# EAGLE board SignalMast-ColorLight-Dwarf_array (EAGLE 7.7.0)
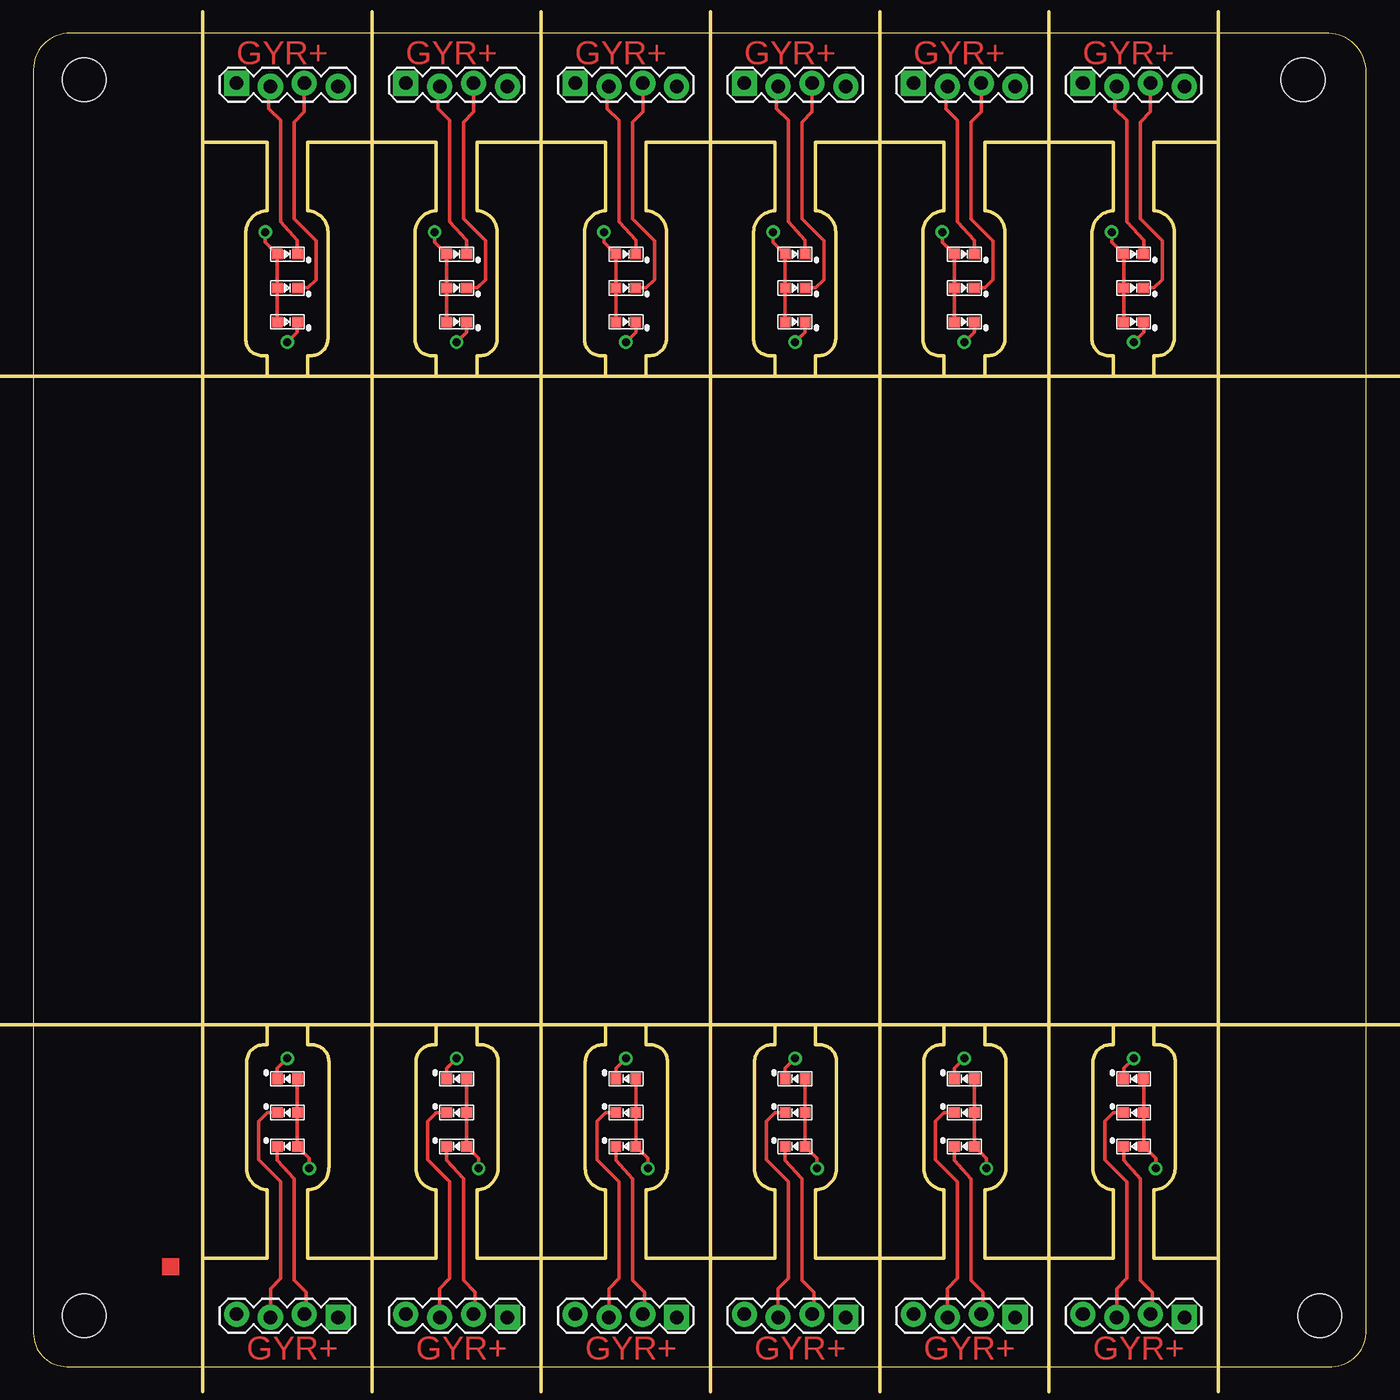
[diagram p0: board, top side]
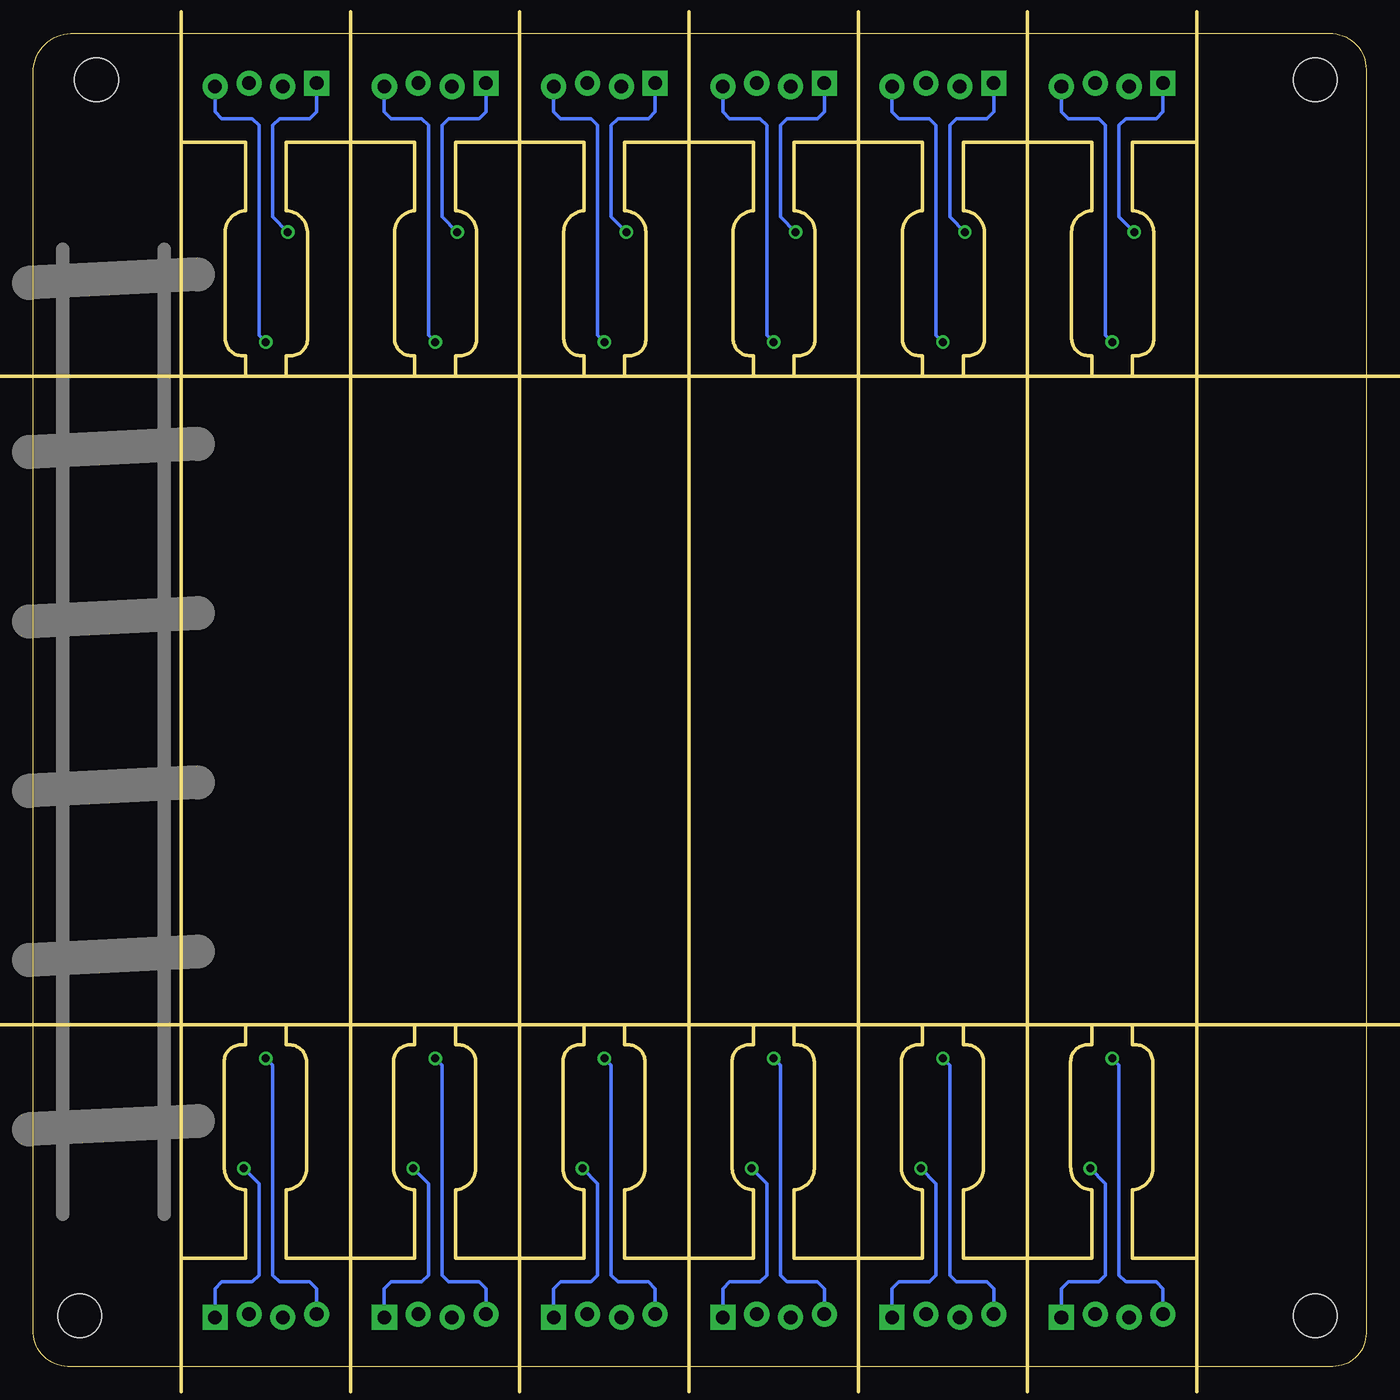
[diagram p1: board, bottom side, seen from below]

Size 100.01 x 100 mm. Coordinates in mm from the lower left corner, seen from the top.
Outline: 22.18,14.99 arc-90 20.58,13.25 20.58,8.13 30.24,8.13 30.24,13.25 arc-90 28.71,14.99 28.71,22.86 arc-90 30.01,24.13 30.24,24.13 30.24,25.66 20.58,25.66 20.58,24.13 20.96,24.13 arc-90 22.18,22.86 22.18,14.99
Outline: 16.01,22.86 16.01,14.99 arc90 17.54,13.25 17.54,8.13 12.71,8.13 12.71,25.66 17.54,25.66 17.54,24.13 17.31,24.13 arc90 16.01,22.86
Outline: 34.88,14.99 arc-90 33.28,13.25 33.28,8.13 42.94,8.13 42.94,13.25 arc-90 41.41,14.99 41.41,22.86 arc-90 42.71,24.13 42.94,24.13 42.94,25.66 33.28,25.66 33.28,24.13 33.66,24.13 arc-90 34.88,22.86 34.88,14.99
Outline: 47.58,14.99 arc-90 45.98,13.25 45.98,8.13 55.64,8.13 55.64,13.25 arc-90 54.11,14.99 54.11,22.86 arc-90 55.41,24.13 55.64,24.13 55.64,25.66 45.98,25.66 45.98,24.13 46.36,24.13 arc-90 47.58,22.86 47.58,14.99
Outline: 60.28,14.99 arc-90 58.68,13.25 58.68,8.13 68.34,8.13 68.34,13.25 arc-90 66.81,14.99 66.81,22.86 arc-90 68.11,24.13 68.34,24.13 68.34,25.66 58.68,25.66 58.68,24.13 59.06,24.13 arc-90 60.28,22.86 60.28,14.99
Outline: 72.98,14.99 arc-90 71.38,13.25 71.38,8.13 81.04,8.13 81.04,13.25 arc-90 79.51,14.99 79.51,22.86 arc-90 80.81,24.13 81.04,24.13 81.04,25.66 71.38,25.66 71.38,24.13 71.76,24.13 arc-90 72.98,22.86 72.98,14.99
Outline: 85.68,14.99 arc-90 84.08,13.25 84.08,8.13 88.91,8.13 88.91,25.66 84.08,25.66 84.08,24.13 84.46,24.13 arc-90 85.68,22.86 85.68,14.99
Outline: 28.64,84.97 arc-90 30.24,86.7 30.24,91.82 20.58,91.82 20.58,86.7 arc-90 22.11,84.97 22.11,77.09 arc-90 20.81,75.82 20.58,75.82 20.58,74.3 30.24,74.3 30.24,75.82 29.85,75.82 arc-90 28.64,77.09 28.64,84.97
Outline: 34.81,77.09 34.81,84.97 arc90 33.28,86.7 33.28,91.82 42.94,91.82 42.94,86.7 arc90 41.34,84.97 41.34,77.09 arc90 42.55,75.82 42.94,75.82 42.94,74.3 33.28,74.3 33.28,75.82 33.51,75.82 arc90 34.81,77.09
Outline: 47.51,77.09 47.51,84.97 arc90 45.98,86.7 45.98,91.82 55.64,91.82 55.64,86.7 arc90 54.04,84.97 54.04,77.09 arc90 55.25,75.82 55.64,75.82 55.64,74.3 45.98,74.3 45.98,75.82 46.21,75.82 arc90 47.51,77.09
Outline: 60.21,77.09 60.21,84.97 arc90 58.68,86.7 58.68,91.82 68.34,91.82 68.34,86.7 arc90 66.74,84.97 66.74,77.09 arc90 67.95,75.82 68.34,75.82 68.34,74.3 58.68,74.3 58.68,75.82 58.91,75.82 arc90 60.21,77.09
Outline: 15.94,84.97 arc-90 17.54,86.7 17.54,91.82 12.71,91.82 12.71,74.3 17.54,74.3 17.54,75.82 17.15,75.82 arc-90 15.94,77.09 15.94,84.97
Outline: 72.91,77.09 72.91,84.97 arc90 71.38,86.7 71.38,91.82 81.04,91.82 81.04,86.7 arc90 79.44,84.97 79.44,77.09 arc90 80.65,75.82 81.04,75.82 81.04,74.3 71.38,74.3 71.38,75.82 71.61,75.82 arc90 72.91,77.09
Outline: 85.61,77.09 85.61,84.97 arc90 84.08,86.7 84.08,91.82 88.91,91.82 88.91,74.3 84.08,74.3 84.08,75.82 84.31,75.82 arc90 85.61,77.09
Copper layers (1*16): Top 0.035mm / dielectric 1.5mm / Bottom 0.035mm
Design rules "default": minimum track width 10mil, minimum drill 24mil, track to track 8mil, track to pad 8mil, pad to pad 8mil, via to via 8mil, smd to smd 8mil, copper to edge 40mil, drill to drill 8mil, minimum pad ring 10mil, minimum via ring 8mil, stop-mask expansion 4mil, vias tented up to drill 0mil, thermal gap 10mil
Net classes: 0 default: width 0.203 mm
Holes 3.3 mm at 3.82,3.81 96.53,3.81 95.26,96.52 3.82,96.52
Milling: 23 lines

## Footprints (pad centres in the part's own frame; a part is rotated, then mirrored left to right if it is on the bottom)
1X04_LOCK = drill 1.016 pad 1.88 square: 1 0,0.127 | drill 1.016 pad 1.88: 2 2.54,-0.127; 3 5.08,0.127; 4 7.62,-0.127
0603-LED = smd 0.8 x 0.8: A 0.75,0; C -0.75,0

## Placement (x,y rotation side)
BOARD1  BOARD  [BOARD-SEEED10X10-NOHOLES]  0.01,0 0 top
GYR+  0.100  [1X04_LOCK]  22.87,3.81 180 top
GYR+1  0.100  [1X04_LOCK]  35.57,3.81 180 top
GYR+2  0.100  [1X04_LOCK]  48.27,3.81 180 top
GYR+3  0.100  [1X04_LOCK]  60.97,3.81 180 top
GYR+4  0.100  [1X04_LOCK]  73.67,3.81 180 top
GYR+5  0.100  [1X04_LOCK]  86.37,3.81 180 top
GYR+6  0.100  [1X04_LOCK]  27.95,96.14 0 top
GYR+7  0.100  [1X04_LOCK]  40.65,96.14 0 top
GYR+8  0.100  [1X04_LOCK]  53.35,96.14 0 top
GYR+9  0.100  [1X04_LOCK]  15.25,96.14 0 top
GYR+10  0.100  [1X04_LOCK]  66.05,96.14 0 top
GYR+11  0.100  [1X04_LOCK]  78.75,96.14 0 top
LED1  R  [0603-LED]  19.06,16.51 0 top
LED2  Y  [0603-LED]  19.06,19.05 0 top
LED3  G  [0603-LED]  19.06,21.59 0 top
LED4  R  [0603-LED]  31.76,16.51 0 top
LED5  Y  [0603-LED]  31.76,19.05 0 top
LED6  G  [0603-LED]  31.76,21.59 0 top
LED7  R  [0603-LED]  44.46,16.51 0 top
LED8  Y  [0603-LED]  44.46,19.05 0 top
LED9  G  [0603-LED]  44.46,21.59 0 top
LED10  R  [0603-LED]  57.16,16.51 0 top
LED11  Y  [0603-LED]  57.16,19.05 0 top
LED12  G  [0603-LED]  57.16,21.59 0 top
LED13  R  [0603-LED]  69.86,16.51 0 top
LED14  Y  [0603-LED]  69.86,19.05 0 top
LED15  G  [0603-LED]  69.86,21.59 0 top
LED16  R  [0603-LED]  82.56,16.51 0 top
LED17  Y  [0603-LED]  82.56,19.05 0 top
LED18  G  [0603-LED]  82.56,21.59 0 top
LED19  R  [0603-LED]  31.76,83.44 180 top
LED20  Y  [0603-LED]  31.76,80.9 180 top
LED21  G  [0603-LED]  31.76,78.36 180 top
LED22  R  [0603-LED]  44.46,83.44 180 top
LED23  Y  [0603-LED]  44.46,80.9 180 top
LED24  G  [0603-LED]  44.46,78.36 180 top
LED25  R  [0603-LED]  57.16,83.44 180 top
LED26  Y  [0603-LED]  57.16,80.9 180 top
LED27  G  [0603-LED]  57.16,78.36 180 top
LED28  R  [0603-LED]  19.06,83.44 180 top
LED29  Y  [0603-LED]  19.06,80.9 180 top
LED30  G  [0603-LED]  19.06,78.36 180 top
LED31  R  [0603-LED]  69.86,83.44 180 top
LED32  Y  [0603-LED]  69.86,80.9 180 top
LED33  G  [0603-LED]  69.86,78.36 180 top
LED34  R  [0603-LED]  82.56,83.44 180 top
LED35  Y  [0603-LED]  82.56,80.9 180 top
LED36  G  [0603-LED]  82.56,78.36 180 top

## Library data of the parts
BOARD1 GYR+ GYR+1-GYR+11 = SPCoast
LED1 LED4 LED7 LED10 LED13 LED16 LED19 LED22 LED25 LED28 LED31 LED34 = SPCoast; OPL: 19-217-R6C-AL1M2VY-3T
LED2 LED5 LED8 LED11 LED14 LED17 LED20 LED23 LED26 LED29 LED32 LED35 = SPCoast; OPL: 19-217-Y5C-AM1N1VY-3T
LED3 LED6 LED9 LED12 LED15 LED18 LED21 LED24 LED27 LED30 LED33 LED36 = SPCoast; OPL: 19-217-G7C-AN1P2-3T

## Nets
BG: GYR+.4 LED3.C
BG1: GYR+1.4 LED6.C
BG2: GYR+2.4 LED9.C
BG3: GYR+3.4 LED12.C
BG4: GYR+4.4 LED15.C
BG5: GYR+5.4 LED18.C
BG6: GYR+6.4 LED21.C
BG7: GYR+7.4 LED24.C
BG8: GYR+8.4 LED27.C
BG9: GYR+9.4 LED30.C
BG10: GYR+10.4 LED33.C
BG11: GYR+11.4 LED36.C
BR: GYR+.2 LED1.C
BR1: GYR+1.2 LED4.C
BR2: GYR+2.2 LED7.C
BR3: GYR+3.2 LED10.C
BR4: GYR+4.2 LED13.C
BR5: GYR+5.2 LED16.C
BR6: GYR+6.2 LED19.C
BR7: GYR+7.2 LED22.C
BR8: GYR+8.2 LED25.C
BR9: GYR+9.2 LED28.C
BR10: GYR+10.2 LED31.C
BR11: GYR+11.2 LED34.C
BV+: GYR+.1 LED1.A LED2.A LED3.A
BV+1: GYR+1.1 LED4.A LED5.A LED6.A
BV+2: GYR+2.1 LED7.A LED8.A LED9.A
BV+3: GYR+3.1 LED10.A LED11.A LED12.A
BV+4: GYR+4.1 LED13.A LED14.A LED15.A
BV+5: GYR+5.1 LED16.A LED17.A LED18.A
BV+6: GYR+6.1 LED19.A LED20.A LED21.A
BV+7: GYR+7.1 LED22.A LED23.A LED24.A
BV+8: GYR+8.1 LED25.A LED26.A LED27.A
BV+9: GYR+9.1 LED28.A LED29.A LED30.A
BV+10: GYR+10.1 LED31.A LED32.A LED33.A
BV+11: GYR+11.1 LED34.A LED35.A LED36.A
BY: GYR+.3 LED2.C
BY1: GYR+1.3 LED5.C
BY2: GYR+2.3 LED8.C
BY3: GYR+3.3 LED11.C
BY4: GYR+4.3 LED14.C
BY5: GYR+5.3 LED17.C
BY6: GYR+6.3 LED20.C
BY7: GYR+7.3 LED23.C
BY8: GYR+8.3 LED26.C
BY9: GYR+9.3 LED29.C
BY10: GYR+10.3 LED32.C
BY11: GYR+11.3 LED35.C

## Tracks (layer width: path | path; a pad name or v marks a point on that pad's centre or on a via)
BG  (via drill 0.6)
  Top 0.254: v19.06,23.12 18.31,22.37 LED3.C
  Bottom 0.254: GYR+.4 15.25,5.85 15.76,6.35 18.04,6.35 18.55,6.86 18.55,22.61 v19.06,23.12
BG1  (via drill 0.6)
  Top 0.254: v31.76,23.12 31.01,22.37 LED6.C
  Bottom 0.254: GYR+1.4 27.95,5.85 28.46,6.35 30.74,6.35 31.25,6.86 31.25,22.61 v31.76,23.12
BG2  (via drill 0.6)
  Top 0.254: v44.46,23.12 43.71,22.37 LED9.C
  Bottom 0.254: GYR+2.4 40.65,5.85 41.16,6.35 43.44,6.35 43.95,6.86 43.95,22.61 v44.46,23.12
BG3  (via drill 0.6)
  Top 0.254: v57.16,23.12 56.41,22.37 LED12.C
  Bottom 0.254: GYR+3.4 53.35,5.85 53.86,6.35 56.14,6.35 56.65,6.86 56.65,22.61 v57.16,23.12
BG4  (via drill 0.6)
  Top 0.254: v69.86,23.12 69.11,22.37 LED15.C
  Bottom 0.254: GYR+4.4 66.05,5.85 66.56,6.35 68.84,6.35 69.35,6.86 69.35,22.61 v69.86,23.12
BG5  (via drill 0.6)
  Top 0.254: v82.56,23.12 81.81,22.37 LED18.C
  Bottom 0.254: GYR+5.4 78.75,5.85 79.26,6.35 81.54,6.35 82.05,6.86 82.05,22.61 v82.56,23.12
BG6  (via drill 0.6)
  Top 0.254: v31.76,76.84 32.51,77.59 LED21.C
  Bottom 0.254: GYR+6.4 35.57,94.11 35.06,93.6 32.78,93.6 32.27,93.09 32.27,77.35 v31.76,76.84
BG7  (via drill 0.6)
  Top 0.254: v44.46,76.84 45.21,77.59 LED24.C
  Bottom 0.254: GYR+7.4 48.27,94.11 47.76,93.6 45.48,93.6 44.97,93.09 44.97,77.35 v44.46,76.84
BG8  (via drill 0.6)
  Top 0.254: v57.16,76.84 57.91,77.59 LED27.C
  Bottom 0.254: GYR+8.4 60.97,94.11 60.46,93.6 58.18,93.6 57.67,93.09 57.67,77.35 v57.16,76.84
BG9  (via drill 0.6)
  Top 0.254: v19.06,76.84 19.81,77.59 LED30.C
  Bottom 0.254: GYR+9.4 22.87,94.11 22.36,93.6 20.08,93.6 19.57,93.09 19.57,77.35 v19.06,76.84
BG10  (via drill 0.6)
  Top 0.254: v69.86,76.84 70.61,77.59 LED33.C
  Bottom 0.254: GYR+10.4 73.67,94.11 73.16,93.6 70.88,93.6 70.37,93.09 70.37,77.35 v69.86,76.84
BG11  (via drill 0.6)
  Top 0.254: v82.56,76.84 83.31,77.59 LED36.C
  Bottom 0.254: GYR+11.4 86.37,94.11 85.86,93.6 83.58,93.6 83.07,93.09 83.07,77.35 v82.56,76.84
BR
  Top 0.254: GYR+.2 20.46,4.07 20.46,5.59 19.57,6.48 19.57,14.1 18.31,15.49 LED1.C
BR1
  Top 0.254: GYR+1.2 33.16,4.07 33.16,5.59 32.27,6.48 32.27,14.1 31.01,15.49 LED4.C
BR2
  Top 0.254: GYR+2.2 45.86,4.07 45.86,5.59 44.97,6.48 44.97,14.1 43.71,15.49 LED7.C
BR3
  Top 0.254: GYR+3.2 58.56,4.07 58.56,5.59 57.67,6.48 57.67,14.1 56.41,15.49 LED10.C
BR4
  Top 0.254: GYR+4.2 71.26,4.07 71.26,5.59 70.37,6.48 70.37,14.1 69.11,15.49 LED13.C
BR5
  Top 0.254: GYR+5.2 83.96,4.07 83.96,5.59 83.07,6.48 83.07,14.1 81.81,15.49 LED16.C
BR6
  Top 0.254: GYR+6.2 30.36,95.89 30.36,94.36 31.25,93.48 31.25,85.86 32.51,84.47 LED19.C
BR7
  Top 0.254: GYR+7.2 43.06,95.89 43.06,94.36 43.95,93.48 43.95,85.86 45.21,84.47 LED22.C
BR8
  Top 0.254: GYR+8.2 55.76,95.89 55.76,94.36 56.65,93.48 56.65,85.86 57.91,84.47 LED25.C
BR9
  Top 0.254: GYR+9.2 17.66,95.89 17.66,94.36 18.55,93.48 18.55,85.86 19.81,84.47 LED28.C
BR10
  Top 0.254: GYR+10.2 68.46,95.89 68.46,94.36 69.35,93.48 69.35,85.86 70.61,84.47 LED31.C
BR11
  Top 0.254: GYR+11.2 81.16,95.89 81.16,94.36 82.05,93.48 82.05,85.86 83.31,84.47 LED34.C
BV+  (via drill 0.6)
  Top 0.254: v20.71,14.86 20.71,15.61 LED1.A LED2.A LED3.A
  Bottom 0.254: GYR+.1 22.87,5.85 22.36,6.35 20.08,6.35 19.57,6.86 19.57,13.72 v20.71,14.86
BV+1  (via drill 0.6)
  Top 0.254: v33.41,14.86 33.41,15.61 LED4.A LED5.A LED6.A
  Bottom 0.254: GYR+1.1 35.57,5.85 35.06,6.35 32.78,6.35 32.27,6.86 32.27,13.72 v33.41,14.86
BV+2  (via drill 0.6)
  Top 0.254: v46.11,14.86 46.11,15.61 LED7.A LED8.A LED9.A
  Bottom 0.254: GYR+2.1 48.27,5.85 47.76,6.35 45.48,6.35 44.97,6.86 44.97,13.72 v46.11,14.86
BV+3  (via drill 0.6)
  Top 0.254: v58.81,14.86 58.81,15.61 LED10.A LED11.A LED12.A
  Bottom 0.254: GYR+3.1 60.97,5.85 60.46,6.35 58.18,6.35 57.67,6.86 57.67,13.72 v58.81,14.86
BV+4  (via drill 0.6)
  Top 0.254: v71.51,14.86 71.51,15.61 LED13.A LED14.A LED15.A
  Bottom 0.254: GYR+4.1 73.67,5.85 73.16,6.35 70.88,6.35 70.37,6.86 70.37,13.72 v71.51,14.86
BV+5  (via drill 0.6)
  Top 0.254: v84.21,14.86 84.21,15.61 LED16.A LED17.A LED18.A
  Bottom 0.254: GYR+5.1 86.37,5.85 85.86,6.35 83.58,6.35 83.07,6.86 83.07,13.72 v84.21,14.86
BV+6  (via drill 0.6)
  Top 0.254: v30.11,85.09 30.11,84.34 LED19.A LED20.A LED21.A
  Bottom 0.254: GYR+6.1 27.95,94.11 28.46,93.6 30.74,93.6 31.25,93.09 31.25,86.24 v30.11,85.09
BV+7  (via drill 0.6)
  Top 0.254: v42.81,85.09 42.81,84.34 LED22.A LED23.A LED24.A
  Bottom 0.254: GYR+7.1 40.65,94.11 41.16,93.6 43.44,93.6 43.95,93.09 43.95,86.24 v42.81,85.09
BV+8  (via drill 0.6)
  Top 0.254: v55.51,85.09 55.51,84.34 LED25.A LED26.A LED27.A
  Bottom 0.254: GYR+8.1 53.35,94.11 53.86,93.6 56.14,93.6 56.65,93.09 56.65,86.24 v55.51,85.09
BV+9  (via drill 0.6)
  Top 0.254: v17.41,85.09 17.41,84.34 LED28.A LED29.A LED30.A
  Bottom 0.254: GYR+9.1 15.25,94.11 15.76,93.6 18.04,93.6 18.55,93.09 18.55,86.24 v17.41,85.09
BV+10  (via drill 0.6)
  Top 0.254: v68.21,85.09 68.21,84.34 LED31.A LED32.A LED33.A
  Bottom 0.254: GYR+10.1 66.05,94.11 66.56,93.6 68.84,93.6 69.35,93.09 69.35,86.24 v68.21,85.09
BV+11  (via drill 0.6)
  Top 0.254: v80.91,85.09 80.91,84.34 LED34.A LED35.A LED36.A
  Bottom 0.254: GYR+11.1 78.75,94.11 79.26,93.6 81.54,93.6 82.05,93.09 82.05,86.24 v80.91,85.09
BY
  Top 0.254: GYR+.3 17.79,5.85 18.55,6.61 18.55,13.85 16.9,15.5 16.9,18.42 17.54,19.05 LED2.C
BY1
  Top 0.254: GYR+1.3 30.49,5.85 31.25,6.61 31.25,13.85 29.6,15.5 29.6,18.42 30.24,19.05 LED5.C
BY2
  Top 0.254: GYR+2.3 43.19,5.85 43.95,6.61 43.95,13.85 42.3,15.5 42.3,18.42 42.94,19.05 LED8.C
BY3
  Top 0.254: GYR+3.3 55.89,5.85 56.65,6.61 56.65,13.85 55,15.5 55,18.42 55.64,19.05 LED11.C
BY4
  Top 0.254: GYR+4.3 68.59,5.85 69.35,6.61 69.35,13.85 67.7,15.5 67.7,18.42 68.34,19.05 LED14.C
BY5
  Top 0.254: GYR+5.3 81.29,5.85 82.05,6.61 82.05,13.85 80.4,15.5 80.4,18.42 81.04,19.05 LED17.C
BY6
  Top 0.254: GYR+6.3 33.03,94.11 32.27,93.35 32.27,86.11 33.92,84.46 33.92,81.54 33.28,80.9 LED20.C
BY7
  Top 0.254: GYR+7.3 45.73,94.11 44.97,93.35 44.97,86.11 46.62,84.46 46.62,81.54 45.98,80.9 LED23.C
BY8
  Top 0.254: GYR+8.3 58.43,94.11 57.67,93.35 57.67,86.11 59.32,84.46 59.32,81.54 58.68,80.9 LED26.C
BY9
  Top 0.254: GYR+9.3 20.33,94.11 19.57,93.35 19.57,86.11 21.22,84.46 21.22,81.54 20.58,80.9 LED29.C
BY10
  Top 0.254: GYR+10.3 71.13,94.11 70.37,93.35 70.37,86.11 72.02,84.46 72.02,81.54 71.38,80.9 LED32.C
BY11
  Top 0.254: GYR+11.3 83.83,94.11 83.07,93.35 83.07,86.11 84.72,84.46 84.72,81.54 84.08,80.9 LED35.C
(copper drawn outside any net)
  shapes: Top area x1

## Text on the board
Top: GYR+ | GYR+ | GYR+ | GYR+ | GYR+ | GYR+ | GYR+ | GYR+ | GYR+ | GYR+ | GYR+ | GYR+
Milling: V-SCORE | V-SCORE | V-SCORE | V-SCORE | V-SCORE | V-SCORE | V-SCORE | V-SCORE | V-SCORE
tDocu: v1.0E | v1.1 | Color Light / Dwarf | John Plocher - SPCoast.com | Black soldermask / white silkscreen | Dwarf CL Signal Mast
bDocu: Made in the PCR, Coast Division, NMRA | Model Railroading is Fun!